# EAGLE board FAIO-Switch (EAGLE 7.7.0)
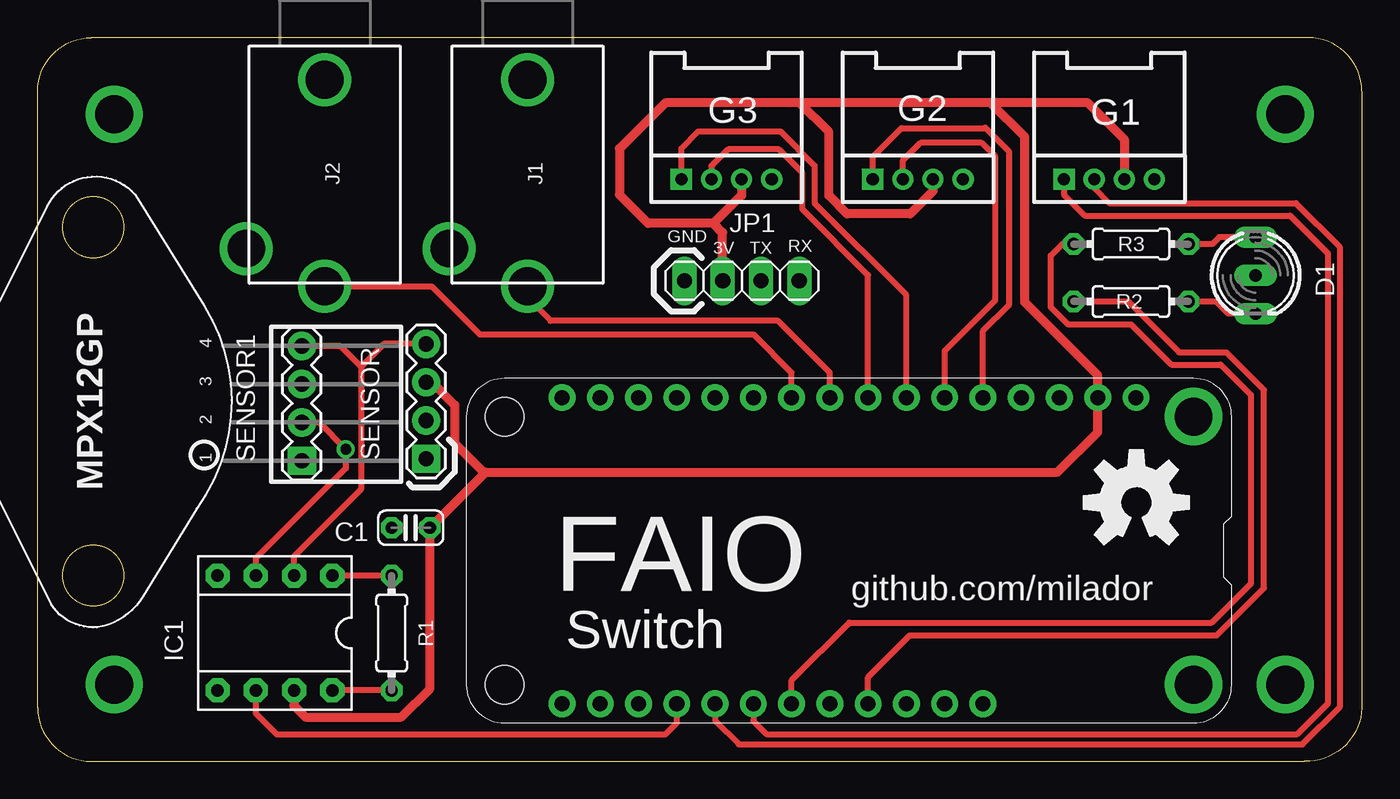
[diagram p0: board, top side]
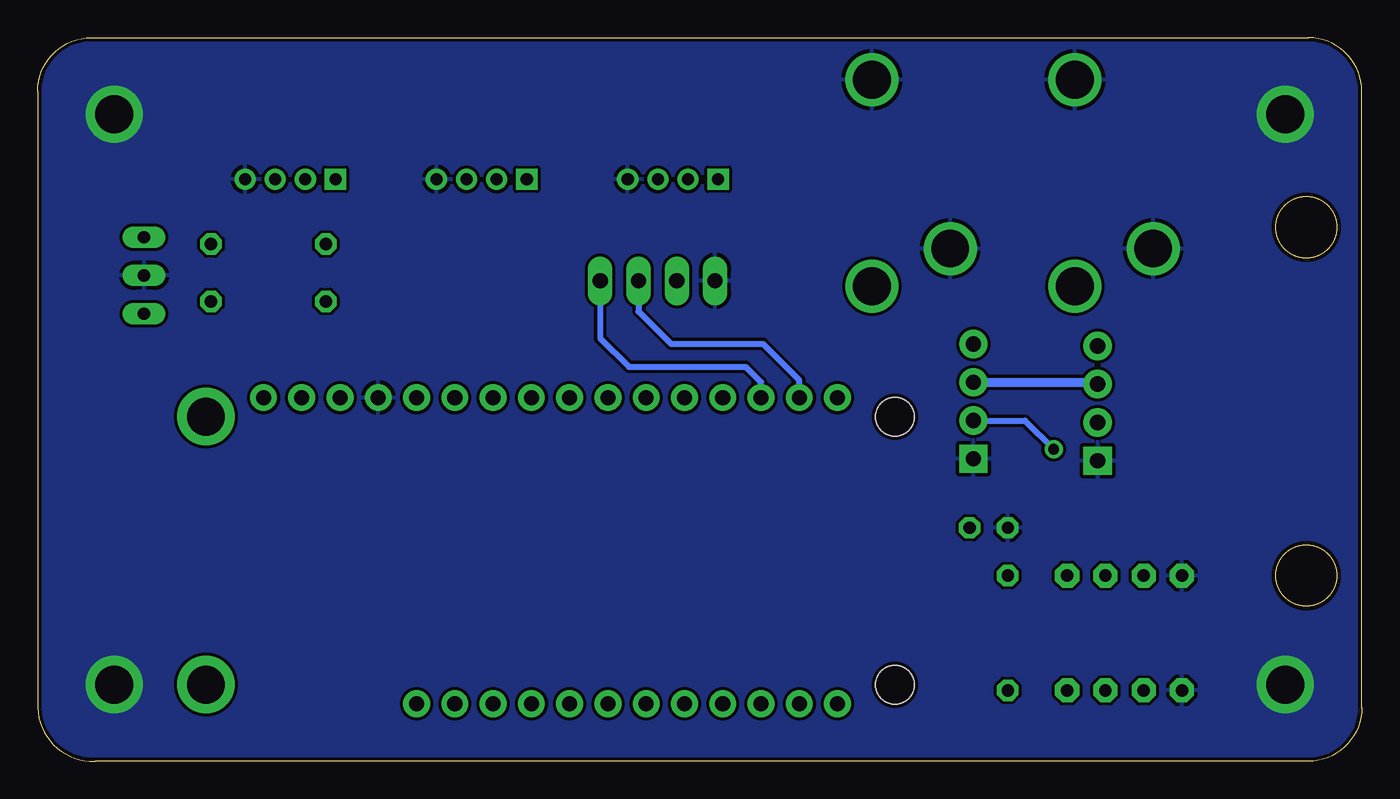
[diagram p1: board, bottom side, seen from below]

Size 87.88 x 48.01 mm. Coordinates in mm from the lower left corner, seen from the top.
Outline: 3.56,0 84.07,0 arc90 87.88,3.56 87.88,44.45 arc90 84.33,48.01 3.56,48.01 arc90 0,44.45 0,3.56 arc90 3.56,0
Copper layers (1*16): Top 0.035mm / dielectric 1.5mm / Bottom 0.035mm
Design rules "SparkFun": minimum track width 8mil, minimum drill 20mil, track to track 8mil, track to pad 8mil, pad to pad 8mil, via to via 8mil, smd to smd 8mil, copper to edge 10mil, drill to drill 8mil, minimum pad ring 12mil, minimum via ring 10mil, stop-mask expansion 4mil, vias tented up to drill 25mil, thermal gap 10mil

## Footprints (pad centres in the part's own frame; a part is rotated, then mirrored left to right if it is on the bottom)
C025-024X044 = drill 0.813 octagon: 1 -1.27,0; 2 1.27,0
DUOLED5MM = drill 0.813 long: AG -2.54,0; AR 2.54,0; K 0,0
4P-2.0-90D = drill 0.8 pad 1.27 square: 1 -3,0 | drill 0.8 pad 1.27: 2 -1,0; 3 1,0; 4 3,0
DIL08 = drill 0.813 pad 1.6 octagon: 1 -3.81,-3.81; 2 -1.27,-3.81; 3 1.27,-3.81; 4 3.81,-3.81; 5 3.81,3.81; 6 1.27,3.81; 7 -1.27,3.81; 8 -3.81,3.81
MJ-3536N = drill 2.5: 1 0,0; 2 0,13.7; 3 5.2,11.2
1X04 = drill 1.016 long: 1 -3.81,0; 2 -1.27,0; 3 1.27,0; 4 3.81,0
FEATHERWING_DIM = drill 1 pad 1.778: 1 6.35,1.27; 2 8.89,1.27; 3 11.43,1.27; 4 13.97,1.27; 5 16.51,1.27; 6 19.05,1.27; 7 21.59,1.27; 8 24.13,1.27; 9 26.67,1.27; 10 29.21,1.27; 11 31.75,1.27; 12 34.29,1.27; 13 36.83,1.27; 14 39.37,1.27; 15 41.91,1.27; 16 44.45,1.27; 17 44.45,21.59; 18 41.91,21.59; 19 39.37,21.59; 20 36.83,21.59; 21 34.29,21.59; 22 31.75,21.59; 23 29.21,21.59; 24 26.67,21.59; 25 24.13,21.59; 26 21.59,21.59; 27 19.05,21.59; 28 16.51,21.59 | drill 2.5 pad 3.81: P$1 2.54,20.32; P$2 2.54,2.54 | hole 2.54: 48.26,20.32; 48.26,2.54
0204/7 = drill 0.813 octagon: 1 -3.81,0; 2 3.81,0
1X04' = drill 1.016 pad 1.88 square: 1 0,0 | drill 1.016 pad 1.88: 2 2.54,0; 3 5.08,0; 4 7.62,0

## Placement (x,y rotation side)
C1  [C025-024X044]  24.77,15.49 180 top
D1  [DUOLED5MM]  80.82,32.23 270 top
G1  [4P-2.0-90D]  71.12,38.61 0 top
G2  [4P-2.0-90D]  58.42,38.61 0 top
G3  [4P-2.0-90D]  45.72,38.61 0 top
IC1  INA122P  [DIL08]  15.75,8.51 180 top
J1  MJ-3536N  [MJ-3536N]  32.51,45.21 180 top
J2  MJ-3536N  [MJ-3536N]  19.05,45.21 180 top
JP1  [1X04]  46.74,31.88 0 top
MS1  FEATHERWING_NODIM  [FEATHERWING_DIM]  79.25,25.4 180 top
R1  [0204/7]  23.5,8.51 90 top
R2  [0204/7]  72.57,30.51 180 top
R3  [0204/7]  72.57,34.32 180 top
SENSOR  [1X04']  25.78,20.07 90 top
SENSOR1  [1X04']  17.53,19.94 90 top
U1  MPX12GP  [MPX12GP]  3.68,23.88 90 top
U$1  [OSHW-LOGO-L]  72.92,17.17 0 top

## Library data of the parts
C1 R1-R3 = rcl
D1 = led
G1-G3 = Connector
IC1 = burr-brown; MF: TEXAS INSTRUMENTS; MPN: INA122P; OC_FARNELL: 1459460; OC_NEWARK: 15M0948
J1 J2 = con-cuistack
JP1 = pinhead
MS1 = adafruit
SENSOR SENSOR1 = SparkFun-Connectors
U1 = sip-and-puff
U$1 = SparkFun-Aesthetics

## Nets
+3V3: C1.1 G1.3 G2.3 G3.3 IC1.7 JP1.2 MS1.2 SENSOR1.3 SENSOR.3
GND: C1.2 D1.K G1.4 G2.4 G3.4 IC1.4 IC1.5 J1.1 J1.3 J2.1 J2.3 JP1.1 MS1.4 SENSOR1.1 SENSOR.1
N$1: IC1.3 SENSOR1.2 SENSOR.2
N$2: IC1.2 SENSOR1.4 SENSOR.4
N$3: IC1.1 R1.2
N$4: IC1.8 R1.1
N$5: MS1.25 R2.2
N$6: D1.AR R2.1
N$7: D1.AG R3.1
N$8: MS1.23 R3.2
N$9: IC1.6 MS1.20
N$10: JP1.3 MS1.15
N$11: J1.2 MS1.9
N$12: JP1.4 MS1.14
N$14: G3.1 MS1.7
N$15: G1.1 MS1.22
N$16: J2.2 MS1.10
N$17: G2.2 MS1.6
N$18: G2.1 MS1.5
N$19: G1.2 MS1.21
N$20: G3.2 MS1.8

## Tracks (layer width: path | path; a pad name or v marks a point on that pad's centre or on a via)
+3V3
  Top 0.61: SENSOR.3 26.16,25.15 27.69,23.62 27.69,21.08 29.59,19.18 29.72,19.18 | 29.72,19.18 67.69,19.18 70.36,21.84 MS1.2 70.36,25.6 65.51,30.45 65.51,41.43 63.25,43.69 | IC1.7 17.02,3.68 17.78,2.92 24.13,2.92 26.04,4.83 C1.1 29.72,19.18 | 50.57,43.69 41.66,43.69 38.61,40.64 38.61,37.59 40.51,35.69 44.86,35.69 | 63.25,43.69 69.7,43.69 72.11,41.27 G1.3 | 63.25,43.69 50.57,43.69 | G3.3 46.72,37.55 44.86,35.69 | JP1.2 45.47,35.08 44.86,35.69 | G2.3 59.42,37.83 57.91,36.32 53.72,36.32 52.5,37.54 52.5,41.76 50.57,43.69
  Bottom 0.61: SENSOR.3 17.65,25.15 SENSOR1.3
GND  (via drill 2.5 pad 3.81)
  other vias: 82.8,42.93 5.08,5.08 5.08,42.93 82.8,5.08
  pour Bottom: -0.25,48.26 -0.25,-0.25 88.14,-0.25 88.14,48.26
N$1  (via drill 0.7)
  Top 0.406: SENSOR1.2 18.67,22.48 v20.45,20.7 20.45,19.43 14.48,13.46 IC1.3
  Bottom 0.406: SENSOR.2 22.35,22.61 v20.45,20.7
N$2
  Top 0.406: SENSOR.4 22.99,27.69 21.46,26.16 | 21.46,26.16 21.46,18.03 17.02,13.59 IC1.2 | SENSOR1.4 20.07,27.56 21.46,26.16
N$3
  Top 0.406: R1.2 IC1.1
N$4
  Top 0.406: R1.1 IC1.8
N$5
  Top 0.406: R2.2 72.39,30.5 75.77,27.13 78.89,27.13 81.38,24.64 81.38,11.48 78.26,8.36 57.89,8.36 55.12,5.59 MS1.25
N$6
  Top 0.406: R2.1 78.21,30.5 79.02,29.69 D1.AR
N$7
  Top 0.406: D1.AG 78.41,34.77 77.95,34.31 R3.1
N$8
  Top 0.406: R3.2 68,34.31 67.23,33.55 67.23,30.12 68.38,28.98 72.57,28.98 75.23,26.31 78.51,26.31 80.52,24.31 80.52,11.79 77.93,9.2 53.87,9.2 50.04,5.36 MS1.23
N$9
  Top 0.406: IC1.6 14.48,3.17 15.88,1.78 41.66,1.78 42.42,2.54 MS1.20
N$10
  Bottom 0.406: MS1.15 37.34,25.27 39.75,27.69 45.85,27.69 48.01,29.84 JP1.3
N$11
  Top 0.406: MS1.9 52.58,25.78 49.15,29.21 34.04,29.21 32.51,30.73 J1.2
N$12
  Bottom 0.406: MS1.14 39.88,25.15 40.89,26.16 48.64,26.16 50.55,28.07 JP1.4
N$14
  Top 0.406: G3.1 42.72,40.66 43.84,41.78 49.3,41.78 51.56,39.52 51.56,37.03 57.66,30.94 MS1.7
N$15
  Top 0.406: MS1.22 47.5,2.67 48.36,1.8 83.59,1.8 85.65,3.86 85.65,33.68 83.13,36.2 69.49,36.2 68.12,37.57 G1.1
N$16
  Top 0.406: MS1.10 50.04,25.78 47.5,28.32 29.34,28.32 26.15,31.51 J2.2
N$17
  Top 0.406: MS1.6 60.2,27.23 63.55,30.58 63.55,40.13 62.66,41.02 58.6,41.02 57.4,39.83 57.4,38.62 G2.2
N$18
  Top 0.406: MS1.5 62.74,28.55 64.49,30.3 64.49,40.44 62.89,42.04 62.87,42.01 57.33,42.01 55.42,40.1 G2.1
N$19
  Top 0.406: MS1.21 44.96,2.69 46.53,1.12 83.95,1.12 86.41,3.58 86.41,34.14 83.52,37.03 71.12,37.03 70.12,38.03 G1.2
N$20
  Top 0.406: MS1.8 55.12,32.26 50.75,36.63 50.75,39.04 49.2,40.59 45.82,40.59 44.73,39.5 44.72,39.5 G3.2

## Text on the board
tNames: GND | 3V | TX | RX | FAIO | github.com/milador | Switch